# EAGLE board MOTMpowertoEurorack-chicklet (EAGLE 7.2.0)
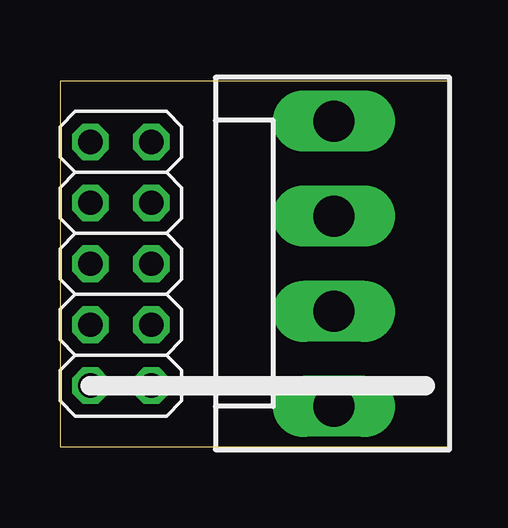
[diagram p0: board, top side]
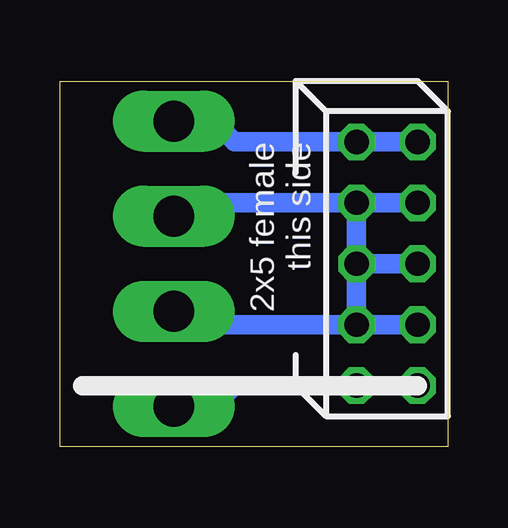
[diagram p1: board, bottom side, seen from below]

Size 16.18 x 15.23 mm. Coordinates in mm from the lower left corner, seen from the top.
Outline: 0,0 16.18,0 16.18,15.23 0,15.23 0,0
Copper layers (1*16): Top 0.035mm / dielectric 1.5mm / Bottom 0.035mm
Design rules "default": minimum track width 10mil, minimum drill 24mil, track to track 8mil, track to pad 8mil, pad to pad 8mil, via to via 8mil, smd to smd 8mil, copper to edge 40mil, drill to drill 8mil, minimum pad ring 10mil, minimum via ring 8mil, stop-mask expansion 4mil, vias tented up to drill 0mil, thermal gap 10mil

## Footprints (pad centres in the part's own frame; a part is rotated, then mirrored left to right if it is on the bottom)
2X05 = drill 1.016 octagon: 1 -5.08,-1.27; 2 -5.08,1.27; 3 -2.54,-1.27; 4 -2.54,1.27; 5 0,-1.27; 6 0,1.27; 7 2.54,-1.27; 8 2.54,1.27; 9 5.08,-1.27; 10 5.08,1.27
KK-156-4 = drill 1.7 pad 2.184 long: 1 -5.94,0; 2 -1.98,0; 3 1.98,0; 4 5.94,0

## Placement (x,y rotation side)
EURO  [2X05]  2.54,7.62 90 top
MOTM  [KK-156-4]  11.43,7.62 90 top

## Library data of the parts
EURO = pinhead
MOTM = con-molex; OC_FARNELL: unknown; OC_NEWARK: unknown

## Nets
N$1: EURO.3 EURO.4 EURO.5 EURO.6 EURO.7 EURO.8 MOTM.2 MOTM.3
N$2: EURO.1 EURO.2 MOTM.1
N$3: EURO.9 EURO.10 MOTM.4

## Tracks (layer width: path | path; a pad name or v marks a point on that pad's centre or on a via)
N$1
  Bottom 0.813: EURO.8 EURO.7 | EURO.6 EURO.5 | EURO.4 EURO.3 | EURO.3 EURO.5 | EURO.7 EURO.5 | EURO.7 10.87,10.16 MOTM.3 | MOTM.2 10.72,5.64 10.16,5.08 EURO.3
N$2
  Bottom 0.813: EURO.2 EURO.1 8.89,2.54 10.16,1.27 11.02,1.27 MOTM.1
N$3
  Bottom 0.813: EURO.10 EURO.9 8.89,12.7 10.16,13.97 11.02,13.97 MOTM.4

## Text on the board
bNames: 2x5 female / this side